# EAGLE board RoundESPtestbd (EAGLE 7.6.0)
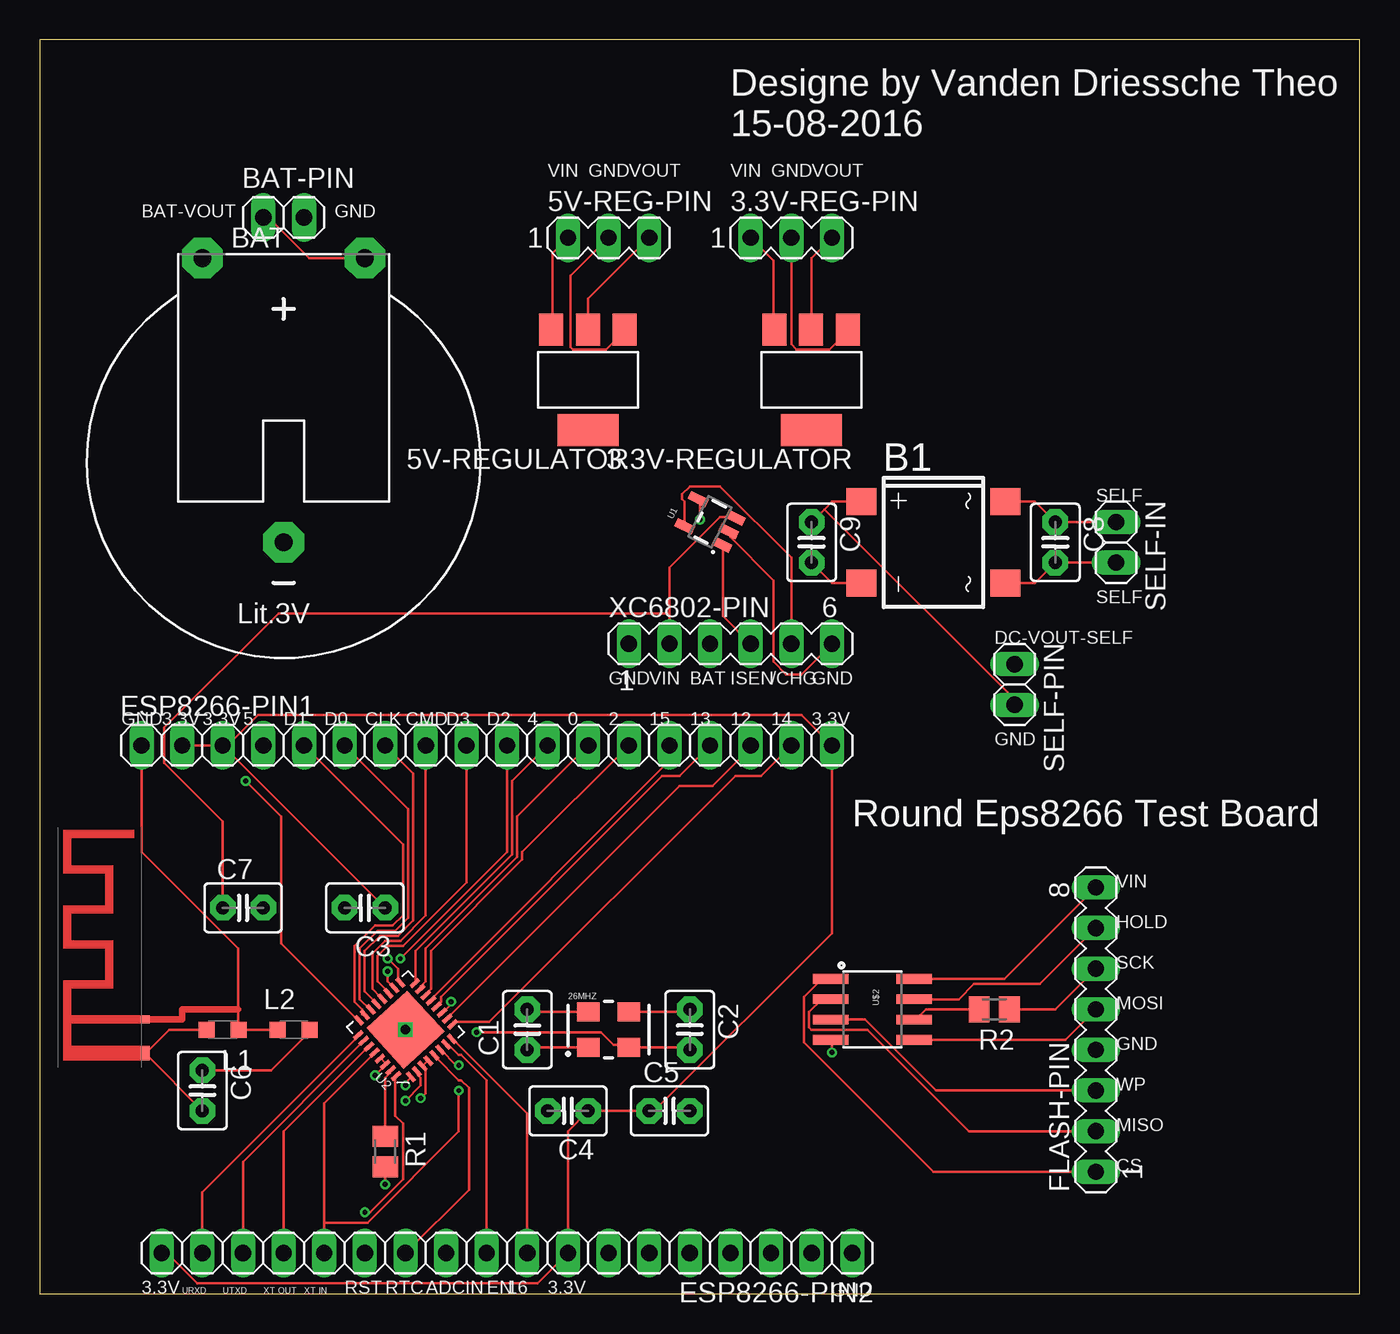
[diagram p0: board, top side]
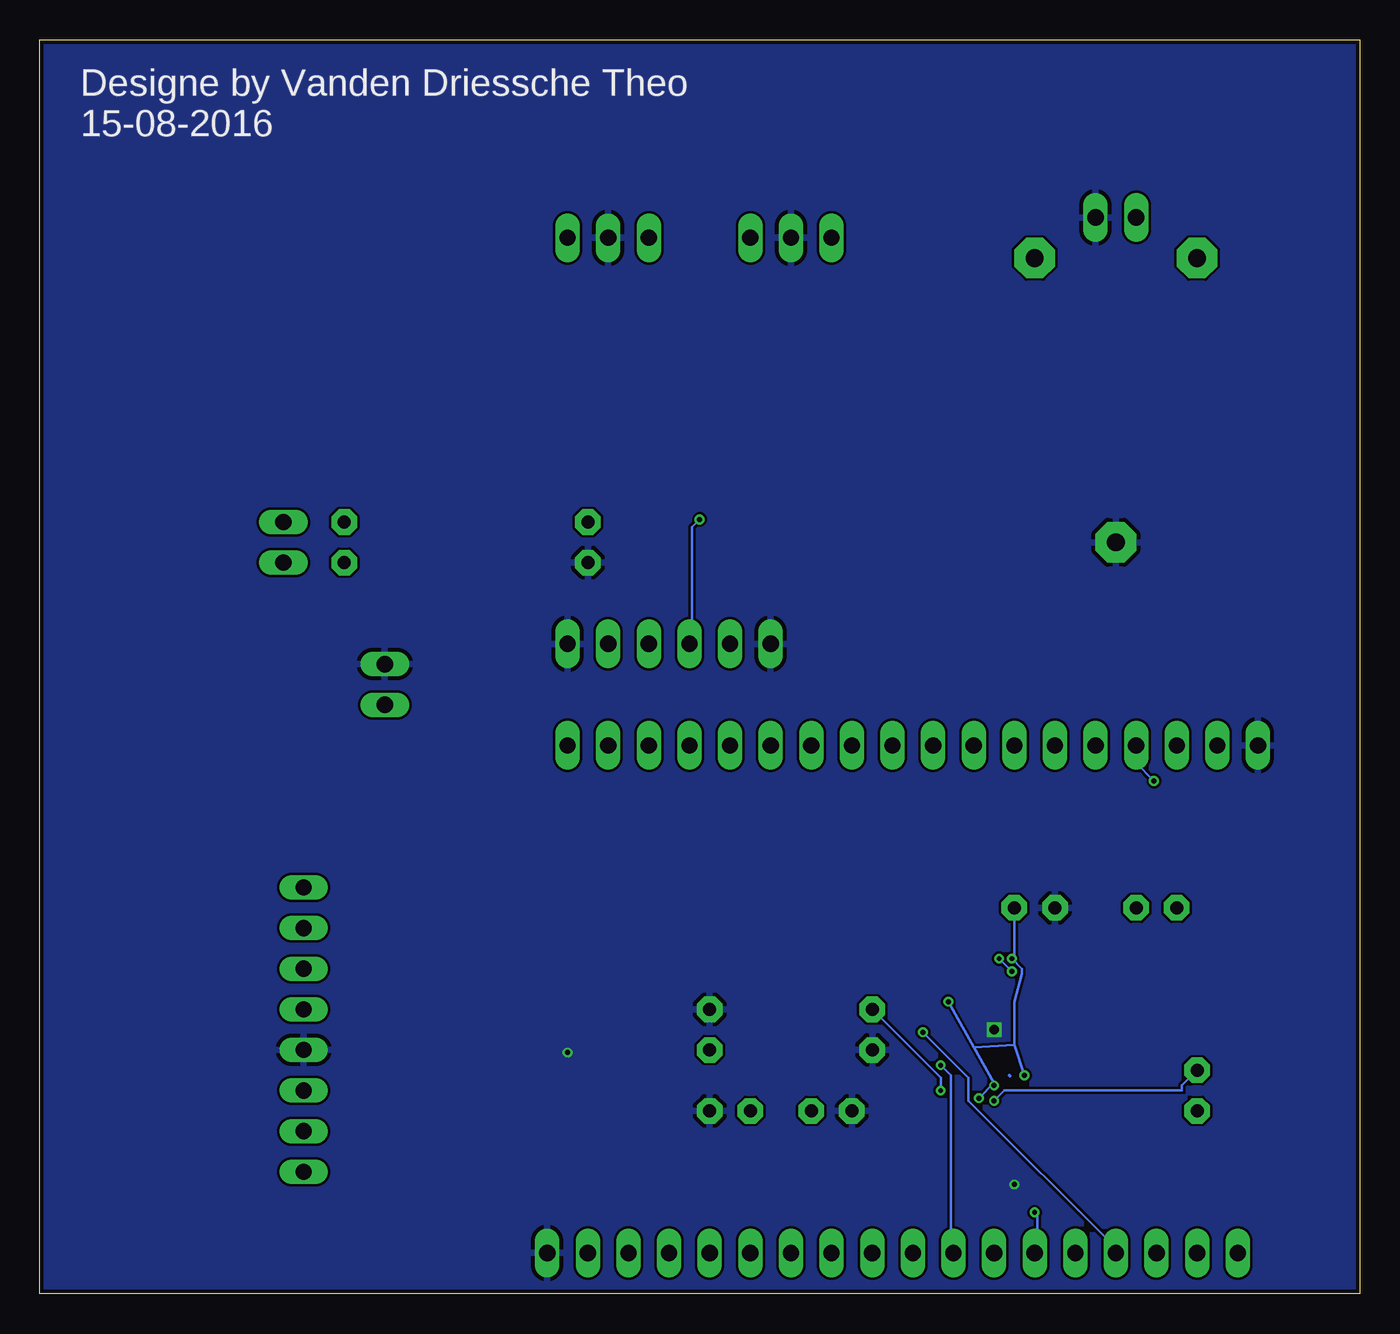
[diagram p1: board, bottom side, seen from below]

Size 82.53 x 78.41 mm. Coordinates in mm from the lower left corner, seen from the top.
Outline: 0,0 82.53,0 82.53,78.41 0,78.41 0,0
Copper layers (1*16): Top 0.035mm / dielectric 1.5mm / Bottom 0.035mm
Design rules "SeeedStudio_2layer_DRU_no_angle_20140221": minimum track width 6mil, minimum drill 12mil, track to track 6mil, track to pad 6mil, pad to pad 6mil, via to via 6mil, smd to smd 0mil, copper to edge 10mil, drill to drill 10mil, minimum pad ring 10mil, minimum via ring 6mil, stop-mask expansion 2mil, vias tented up to drill 100mil, thermal gap 10mil

## Footprints (pad centres in the part's own frame; a part is rotated, then mirrored left to right if it is on the bottom)
MA03-1 = drill 1.016 long: 1 -2.54,0; 2 0,0; 3 2.54,0
SOT223 = smd 1.499 x 2.007: 1 -2.261,-3.15; 2 0.025,-3.15; 3 2.311,-3.15 | smd 3.81 x 2.007: 4 0,3.15
CRYSTAL-OSC-SMD-5X3.2 = smd 1.397 x 1.194: 1 -1.27,-1.1; 2 1.27,-1.1; 3 1.27,1.1; 4 -1.27,1.1
DBS = smd 1.7 x 1.9: + -2.55,-4.5; - 2.55,-4.5; AC1 -2.55,4.5; AC2 2.55,4.5
CR2430H = drill 1.118 pad 2.54 octagon: + 5.08,12.7; +@1 -5.08,12.7; - 0,-5.08
1X02 = drill 1.016 long: 1 -1.27,0; 2 1.27,0
C2.5-3 = drill 0.813 pad 1.6 octagon: 1 -1.27,0; 2 1.27,0
TRACE_ANTENNA_2.4GHZ_15.2MM = smd 0.5 x 0.5: ANT 0,-0.25 | smd 0.9 x 0.5: GND -2.1,-0.25
1X18 = drill 1.016 long: 1 -21.59,0; 2 -19.05,0; 3 -16.51,0; 4 -13.97,0; 5 -11.43,0; 6 -8.89,0; 7 -6.35,0; 8 -3.81,0; 9 -1.27,0; 10 1.27,0; 11 3.81,0; 12 6.35,0; 13 8.89,0; 14 11.43,0; 15 13.97,0; 16 16.51,0; 17 19.05,0; 18 21.59,0
MA08-1 = drill 1.016 long: 1 -8.89,0; 2 -6.35,0; 3 -3.81,0; 4 -1.27,0; 5 1.27,0; 6 3.81,0; 7 6.35,0; 8 8.89,0
L2012C = smd 1 x 1: 1 -1,0; 2 1,0
M0805 = smd 1.3 x 1.6: 1 -0.95,0; 2 0.95,0
SOT23-5 = smd 0.55 x 1.2: 1 -0.95,-1.3; 2 0,-1.3; 3 0.95,-1.3; 4 0.95,1.3; 5 -0.95,1.3
ESP8266EX = smd 0.7 x 0.25: CHIP_EN -2.4,-1.25; GPOIO5 2.4,1.75; LNA -2.4,1.25; SD_CLK 2.4,0.25; SD_CMD 2.4,-0.25; SD_DATA_0 2.4,0.75; SD_DATA_1 2.4,1.25; SD_DATA_2 2.4,-1.25; SD_DATA_3 2.4,-0.75; TOUT -2.4,-0.75; VDD3P3 -2.4,0.75; VDD3P3$2 -2.4,0.25; VDD_RTC -2.4,-0.25; VDDA -2.4,1.75; VDDPST$2 2.4,-1.75; XPD_DCDC -2.4,-1.75 | smd 0.25 x 0.7: EXT_RSTB -1.75,2.4; GPIO0 1.25,-2.4; GPIO2 0.75,-2.4; GPIO4 1.75,-2.4; MTCK -0.25,-2.4; MTDI -1.25,-2.4; MTDO 0.25,-2.4; MTMS -1.75,-2.4; RES12K -1.25,2.4; U0RXD 1.75,2.4; U0TXD 1.25,2.4; VDDA$2 -0.75,2.4; VDDD -0.25,2.4; VDDPST -0.75,-2.4; XTAL_IN 0.25,2.4; XTAL_OUT 0.75,2.4 | smd 3.45 x 3.45: GND 0,0
SO08 = smd 0.61 x 2.21: 1 -1.905,-2.616; 2 -0.635,-2.616; 3 0.635,-2.616; 4 1.905,-2.616; 5 1.905,2.616; 6 0.635,2.616; 7 -0.635,2.616; 8 -1.905,2.616
MA06-1 = drill 1.016 long: 1 -6.35,0; 2 -3.81,0; 3 -1.27,0; 4 1.27,0; 5 3.81,0; 6 6.35,0

## Placement (x,y rotation side)
3.3V-REG-PIN  [MA03-1]  46.99,66.04 0 top
3.3V-REGULATOR  REG1117  [SOT223]  48.26,57.15 180 top
5V-REG-PIN  [MA03-1]  35.56,66.04 0 top
5V-REGULATOR  REG1117  [SOT223]  34.29,57.15 180 top
26MHZ  26MHZ  [CRYSTAL-OSC-SMD-5X3.2]  35.56,16.51 0 top
B1  DBLS201G  [DBS]  55.88,46.99 270 top
BAT  CR2430H  [CR2430H]  15.24,52.07 0 top
BAT-PIN  [1X02]  15.24,67.31 0 top
C1  10pF  [C2.5-3]  30.48,16.51 90 top
C2  10pF  [C2.5-3]  40.64,16.51 270 top
C3  1uF  [C2.5-3]  20.32,24.13 180 top
C4  10uF  [C2.5-3]  33.02,11.43 180 top
C5  0.1uF  [C2.5-3]  39.37,11.43 0 top
C6  5.6pF  [C2.5-3]  10.16,12.7 270 top
C7  1uF  [C2.5-3]  12.7,24.13 0 top
C8  35-33nF  [C2.5-3]  63.5,46.99 270 top
C9  1µF  [C2.5-3]  48.26,46.99 270 top
E1  ANTENNATRACE-15.2MM  [TRACE_ANTENNA_2.4GHZ_15.2MM]  6.35,17.14 90 top
ESP8266-PIN1  [1X18]  27.94,34.29 0 top
ESP8266-PIN2  [1X18]  29.21,2.54 180 top
FLASH-PIN  [MA08-1]  66.04,16.51 90 top
L1  [L2012C]  11.43,16.51 180 top
L2  [L2012C]  15.88,16.51 0 top
R1  12k  [M0805]  21.59,8.89 270 top
R2  200  [M0805]  59.69,17.78 180 top
SELF-IN  [1X02]  67.31,46.99 270 top
SELF-PIN  [1X02]  60.96,38.1 270 top
U1  V_REG_LDOSMD  [SOT23-5]  41.91,48.26 63.5 top
U2  ESP8266EX  [ESP8266EX]  22.86,16.51 132.5 top
U$2  SPI_FLASH-X25XXSMD  [SO08]  52.07,17.78 270 top
XC6802-PIN  [MA06-1]  43.18,40.64 0 top

## Library data of the parts
3.3V-REG-PIN 5V-REG-PIN FLASH-PIN XC6802-PIN = con-lstb; OC_FARNELL: unknown; OC_NEWARK: unknown
3.3V-REGULATOR 5V-REGULATOR = burr-brown; MPN: REG1117; OC_FARNELL: 1097566; OC_NEWARK: 14P6981
26MHZ = SparkFun-FreqCtrl; PROD_ID: XTAL-11986
B1 = rectifier
BAT = battery
BAT-PIN ESP8266-PIN1 ESP8266-PIN2 SELF-IN SELF-PIN = pinhead
C1-C9 = capacitor-wima
E1 = SparkFun-RF
L1 L2 = resistor
R1 R2 = rcl
U1 = SparkFun-PowerIC
U2 = ESP8266EX
U$2 = SparkFun-DigitalIC

## Nets
111: R2.2 U$2.6
/CHG: U1.5 XC6802-PIN.5
ADC_IN: ESP8266-PIN2.11 U2.TOUT
BAT+: BAT-PIN.1 BAT.+
CHIP_ENABLE: ESP8266-PIN2.10 U2.CHIP_EN
CS: FLASH-PIN.1 U$2.1
DC-SELF: B1.+ C9.1 SELF-PIN.2
FLASHVIN: FLASH-PIN.8 U$2.8
GND: 3.3V-REG-PIN.2 3.3V-REGULATOR.1 5V-REG-PIN.2 5V-REGULATOR.1 26MHZ.1 26MHZ.3 B1.- BAT-PIN.2 BAT.- C1.1 C2.1 C3.2 C4.2 C5.2 C9.2 E1.ANT ESP8266-PIN1.1 ESP8266-PIN2.1 FLASH-PIN.4 L1.1 L2.1 R1.2 SELF-PIN.1 U1.2 U2.GND U$2.4 XC6802-PIN.1 XC6802-PIN.6
GPIO0: ESP8266-PIN1.12 U2.GPIO0
GPIO2: ESP8266-PIN1.13 U2.GPIO2
GPIO4: ESP8266-PIN1.11 U2.GPIO4
GPIO5: ESP8266-PIN1.4 U2.GPOIO5
GPIO12: ESP8266-PIN1.16 U2.MTDI
GPIO13: ESP8266-PIN1.15 U2.MTCK
GPIO14: ESP8266-PIN1.17 U2.MTMS
GPIO15: ESP8266-PIN1.14 U2.MTDO
GPIO16: ESP8266-PIN2.9 U2.XPD_DCDC
HOLD: FLASH-PIN.7 U$2.7
IN3.3V: 3.3V-REG-PIN.1 3.3V-REGULATOR.3
IN5V: 5V-REG-PIN.1 5V-REGULATOR.3
ISEN: U1.1 XC6802-PIN.4
MISO: FLASH-PIN.2 U$2.2
MOSI: FLASH-PIN.5 U$2.5
N$2: C6.1 L2.2 U2.LNA
N$3: C6.2 E1.GND L1.2
N$5: R1.1 U2.RES12K
N$6: B1.AC1 C8.1 SELF-IN.1
N$7: B1.AC2 C8.2 SELF-IN.2
N$37: ESP8266-PIN2.7
N$38: ESP8266-PIN2.6
N$39: ESP8266-PIN2.5
N$40: ESP8266-PIN2.4
N$41: ESP8266-PIN2.3
N$42: ESP8266-PIN2.2
OUT3.3V: 3.3V-REG-PIN.3 3.3V-REGULATOR.2
OUT5V: 5V-REG-PIN.3 5V-REGULATOR.2
RST: ESP8266-PIN2.13 U2.EXT_RSTB
SCK: FLASH-PIN.6 R2.1
SD_CLK: ESP8266-PIN1.7 U2.SD_CLK
SD_CMD: ESP8266-PIN1.8 U2.SD_CMD
SD_D0: ESP8266-PIN1.6 U2.SD_DATA_0
SD_D1: ESP8266-PIN1.5 U2.SD_DATA_1
SD_D2: ESP8266-PIN1.10 U2.SD_DATA_2
SD_D3: ESP8266-PIN1.9 U2.SD_DATA_3
URXD: ESP8266-PIN2.17 U2.U0RXD
UTXD: ESP8266-PIN2.16 U2.U0TXD
VDD33: C3.1 C4.1 C5.1 ESP8266-PIN1.2 ESP8266-PIN1.3 ESP8266-PIN1.18 ESP8266-PIN2.8 ESP8266-PIN2.18 U2.VDD3P3 U2.VDD3P3$2 U2.VDDA U2.VDDA$2 U2.VDDD U2.VDDPST U2.VDDPST$2
VDD_RTC: ESP8266-PIN2.12 U2.VDD_RTC
WP: FLASH-PIN.3 U$2.3
XC-BAT: U1.4 XC6802-PIN.3
XC-VIN: C7.1 U1.3 XC6802-PIN.2
XTAL_IN: 26MHZ.4 C1.2 ESP8266-PIN2.14 U2.XTAL_IN
XTAL_OUT: 26MHZ.2 C2.2 ESP8266-PIN2.15 U2.XTAL_OUT

## Tracks (layer width: path | path; a pad name or v marks a point on that pad's centre or on a via)
11
  Bottom 0.203: 21.91,13.65 21.87,13.62
111
  Top 0.152: R2.2 55.4,17.78 54.77,17.14 U$2.6
/CHG
  Top 0.152: XC6802-PIN.5 46.99,46.04 42.55,50.48 40.64,50.48 40.16,50.01 40.16,49.69 40.32,49.53 40.32,48.1 U1.5
ADC_IN  (via drill 0.3)
  Top 0.152: v26.19,14.29 26.04,14.29 25.08,15.24 U2.TOUT
  Bottom 0.152: v26.19,14.29 25.56,13.65 25.56,2.7 ESP8266-PIN2.11
BAT+
  Top 0.152: BAT-PIN.1 14.29,67.31 16.83,64.77 BAT.+
CHIP_ENABLE
  Top 0.152: ESP8266-PIN2.10 27.94,13.34 26.35,14.92 26.19,14.92 25.56,15.56 U2.CHIP_EN
CS
  Top 0.152: U$2.1 48.9,19.68 47.78,18.57 47.78,15.72 55.88,7.62 FLASH-PIN.1
DC-SELF
  Top 0.152: C9.1 49.05,49.05 | 49.05,49.05 49.53,49.53 51.28,49.53 B1.+ | SELF-PIN.2 60.96,37.15 49.05,49.05
FLASHVIN
  Top 0.152: U$2.8 60.33,19.68 FLASH-PIN.8
GND  (via drill 0.3, 0.6)
  Top 0.152: L2.1 L1.1 12.38,16.51 12.38,17.78 12.38,21.59 6.35,27.62 ESP8266-PIN1.1 | XC6802-PIN.6 47.62,38.73 46.67,38.73 45.88,39.53 45.88,44.61 43.18,47.31 43.18,47.62 U1.2 | C1.1 30.64,15.4 34.29,15.4 26MHZ.1 | C2.1 40.48,17.62 26MHZ.3 | v21.59,6.83 R1.2 | C9.2 49.53,44.45 51.28,44.45 B1.- | 5V-REG-PIN.2 33.18,63.66 33.18,59.21 33.34,59.05 35.4,59.05 36.51,60.17 5V-REGULATOR.1 | 3.3V-REG-PIN.2 46.99,59.37 47.31,59.05 49.37,59.05 50.48,60.17 3.3V-REGULATOR.1 | v49.53,15.08 49.53,15.88 U$2.4
  Top 0.406: E1.ANT 8.89,17.14 8.89,17.78 12.38,17.78
  other vias: 22.86,16.51
  pour Bottom: 0,78.74 82.55,78.74 82.55,0 0,0
GPIO0
  Top 0.152: ESP8266-PIN1.12 29.84,29.84 29.84,27.3 24.13,21.59 24.13,19.53 23.81,19.21 U2.GPIO0
GPIO2
  Top 0.152: ESP8266-PIN1.13 30.16,27.62 30.16,27.15 24.45,21.43 24.45,19.05 24.13,18.73 U2.GPIO2
GPIO4
  Top 0.152: ESP8266-PIN1.11 29.53,32.07 29.53,27.46 23.5,21.43 23.5,19.53 U2.GPIO4
GPIO5  (via drill 0.3)
  Top 0.152: v12.86,32.07 15.08,29.84 15.08,21.91 19.84,17.14 U2.GPOIO5
  Bottom 0.152: v12.86,32.07 13.97,33.18 ESP8266-PIN1.4
GPIO12
  Top 0.152: ESP8266-PIN1.16 44.45,34.13 42.07,31.75 40.01,31.75 25.56,17.3 U2.MTDI
GPIO13
  Top 0.152: ESP8266-PIN1.15 40.01,32.38 38.89,32.38 25.08,18.57 25.08,18.26 24.92,18.1 U2.MTCK
GPIO14
  Top 0.152: ESP8266-PIN1.17 45.09,32.38 43.5,32.38 28.1,16.99 25.88,16.99 U2.MTMS
GPIO15
  Top 0.152: ESP8266-PIN1.14 39.37,33.34 24.61,18.57 24.61,18.41 U2.MTDO
GPIO16
  Top 0.152: ESP8266-PIN2.9 30.48,11.27 25.88,15.88 U2.XPD_DCDC
HOLD
  Top 0.152: U$2.7 57.47,18.41 58.42,19.37 62.55,19.37 FLASH-PIN.7
IN3.3V
  Top 0.152: 3.3V-REG-PIN.1 45.88,64.61 45.88,60.33 3.3V-REGULATOR.3
IN5V
  Top 0.152: 5V-REG-PIN.1 32.07,65.09 32.07,60.33 5V-REGULATOR.3
ISEN
  Top 0.152: XC6802-PIN.4 42.7,42.39 42.7,46.67 U1.1
MISO
  Top 0.152: U$2.2 48.9,18.41 48.1,17.62 48.1,16.67 48.26,16.51 51.75,16.51 58.1,10.16 FLASH-PIN.2
MOSI
  Top 0.152: U$2.5 64.14,15.88 FLASH-PIN.5
N$2  (via drill 0.3)
  Top 0.152: v22.86,12.06 23.81,13.02 23.81,13.49 23.65,13.65 23.65,13.81 U2.LNA | L2.2 16.99,16.51 14.45,13.97 C6.1
  Bottom 0.152: v22.86,12.06 22.23,12.7 11.11,12.7 11.11,13.02 C6.1
N$3
  Top 0.152: L1.2 8.1,16.51 6.67,15.08 E1.GND 6.67,14.92 C6.2
N$5
  Top 0.152: R1.1 21.59,13.49 21.91,13.81 U2.RES12K
N$6
  Top 0.152: B1.AC1 60.48,49.53 62.23,49.53 C8.1 SELF-IN.1
N$7
  Top 0.152: B1.AC2 60.48,44.45 62.23,44.45 C8.2 SELF-IN.2
OUT3.3V
  Top 0.152: 3.3V-REG-PIN.3 48.26,64.77 48.26,60.33 3.3V-REGULATOR.2
OUT5V
  Top 0.152: 5V-REG-PIN.3 34.29,62.23 34.29,60.33 5V-REGULATOR.2
RST  (via drill 0.3)
  Top 0.152: v20.32,5.08 20.64,5.08 22.7,7.14 22.7,10.64 22.23,11.11 22.23,13.49 U2.EXT_RSTB
  Bottom 0.152: v20.32,5.08 20.16,4.92 20.16,2.7 ESP8266-PIN2.13
SCK
  Top 0.152: R2.1 63.5,17.78 FLASH-PIN.6
SD_CLK
  Top 0.152: ESP8266-PIN1.7 23.34,32.54 23.34,23.34 22.38,22.38 21.27,22.38 20.32,21.43 20.32,18.89 20.95,18.26 U2.SD_CLK
SD_CMD
  Top 0.152: ESP8266-PIN1.8 24.13,23.65 22.54,22.07 21.59,22.07 20.8,21.27 20.8,19.05 21.27,18.57 U2.SD_CMD
SD_D0
  Top 0.152: ESP8266-PIN1.6 23.02,30.32 23.02,23.5 22.23,22.7 21.11,22.7 20,21.59 20,18.41 20.64,17.78 U2.SD_DATA_0
SD_D1
  Top 0.152: ESP8266-PIN1.5 22.7,28.1 22.7,23.65 22.07,23.02 20.95,23.02 19.68,21.75 19.68,18.26 20.16,17.78 20.16,17.46 U2.SD_DATA_1
SD_D2  (via drill 0.3)
  Top 0.152: v21.75,20.16 21.75,19.53 22.07,19.21 U2.SD_DATA_2 | v22.54,20.95 29.21,27.62 ESP8266-PIN1.10
  Bottom 0.152: v22.54,20.95 v21.75,20.16
SD_D3
  Top 0.152: ESP8266-PIN1.9 26.67,25.72 22.7,21.75 21.75,21.75 21.11,21.11 21.11,19.53 21.75,18.89 U2.SD_DATA_3
URXD
  Top 0.152: ESP8266-PIN2.17 10.16,6.35 19.84,16.03 U2.U0RXD
UTXD
  Top 0.152: ESP8266-PIN2.16 12.7,8.26 20.16,15.72 U2.U0TXD
VDD33  (via drill 0.3)
  Top 0.152: ESP8266-PIN1.2 ESP8266-PIN1.3 11.59,34.13 | U2.VDD3P3$2 24.29,14.61 23.97,14.29 U2.VDD3P3 23.97,14.13 24.13,13.97 24.13,12.54 v23.81,12.22 | U2.VDDD 21.27,14.76 21.59,14.45 U2.VDDA$2 21.59,14.29 v20.95,13.65 | v21.75,20.95 22.38,20.32 22.38,19.53 U2.VDDPST$2 | v22.86,13.02 22.86,13.18 23.18,13.49 U2.VDDA | v25.72,18.26 25.72,18.1 25.24,17.62 U2.VDDPST | C3.1 11.59,34.13 | ESP8266-PIN2.18 7.94,2.54 9.84,0.64 31.11,0.64 ESP8266-PIN2.8 33.02,10.16 C4.1 C5.1 38.42,11.43 49.53,22.54 ESP8266-PIN1.18 47.62,36.2 13.65,36.2 11.59,34.13
  Bottom 0.152: C3.1 21.59,21.11 v21.75,20.95 21.11,20.32 21.11,20 21.59,18.26 21.59,15.56 | 21.59,15.56 24.13,15.4 | 24.13,15.4 22.86,13.18 | 24.13,15.4 v25.72,18.26 | 21.59,15.56 v20.95,13.65 | 22.86,13.18 v23.81,12.22 | 22.86,13.18 v22.86,13.02
VDD_RTC
  Top 0.152: ESP8266-PIN2.12 26.83,6.51 26.83,12.86 26.35,13.34 26.19,13.34 24.77,14.76 U2.VDD_RTC
WP
  Top 0.152: U$2.3 51.59,17.14 56.04,12.7 FLASH-PIN.3
XC-BAT  (via drill 0.3)
  Top 0.152: v41.27,48.42 41.27,49.69 U1.4
  Bottom 0.152: v41.27,48.42 41.75,47.94 41.75,40.8 XC6802-PIN.3
XC-VIN
  Top 0.152: XC6802-PIN.2 39.37,42.55 | 39.37,42.55 39.37,45.4 42.55,48.58 43.34,48.58 U1.3 | C7.1 11.43,29.53 7.78,33.18 7.78,35.4 14.92,42.55 39.37,42.55
XTAL_IN  (via drill 0.3)
  Top 0.152: C1.2 30.64,17.62 26MHZ.4 | ESP8266-PIN2.14 17.78,4.45 | 17.78,4.45 17.78,11.91 20.8,14.92 U2.XTAL_IN | v26.19,12.7 26.19,10.16 20.48,4.45 17.78,4.45
  Bottom 0.152: C1.2 26.19,13.49 v26.19,12.7
XTAL_OUT  (via drill 0.3)
  Top 0.152: C2.2 40.48,15.4 36.83,15.4 26MHZ.2 36.83,15.56 35.88,15.56 35.08,16.35 v27.3,16.35 | ESP8266-PIN2.15 15.24,10.16 20.48,15.4 U2.XTAL_OUT
  Bottom 0.152: v27.3,16.35 24.45,13.49 24.45,12.06 15.24,2.86 ESP8266-PIN2.15

## Text on the board
tNames: Designe by Vanden Driessche Theo / 15-08-2016 | VIN | GND | VOUT | VIN | GND | VOUT | BAT-VOUT | GND | SELF | SELF | DC-VOUT-SELF | GND | VIN | BAT | ISEN | /CHG | GND | GND | 3.3V | 3.3V | 5 | D1 | D0 | CLK | CMD | D3 | D2 | 4 | 0 | 2 | 15 | 13 | 12 | 14 | 3.3V | GND | Round Eps8266 Test Board | VIN | HOLD | SCK | MOSI | GND | WP | MISO | CS | GND | 3.3V | URXD | UTXD | XT OUT | XT IN | RST | RTC | ADCIN | EN | 16 | 3.3V
bNames: Designe by Vanden Driessche Theo / 15-08-2016